# EAGLE board tricolor_rev2 (EAGLE 5.04)
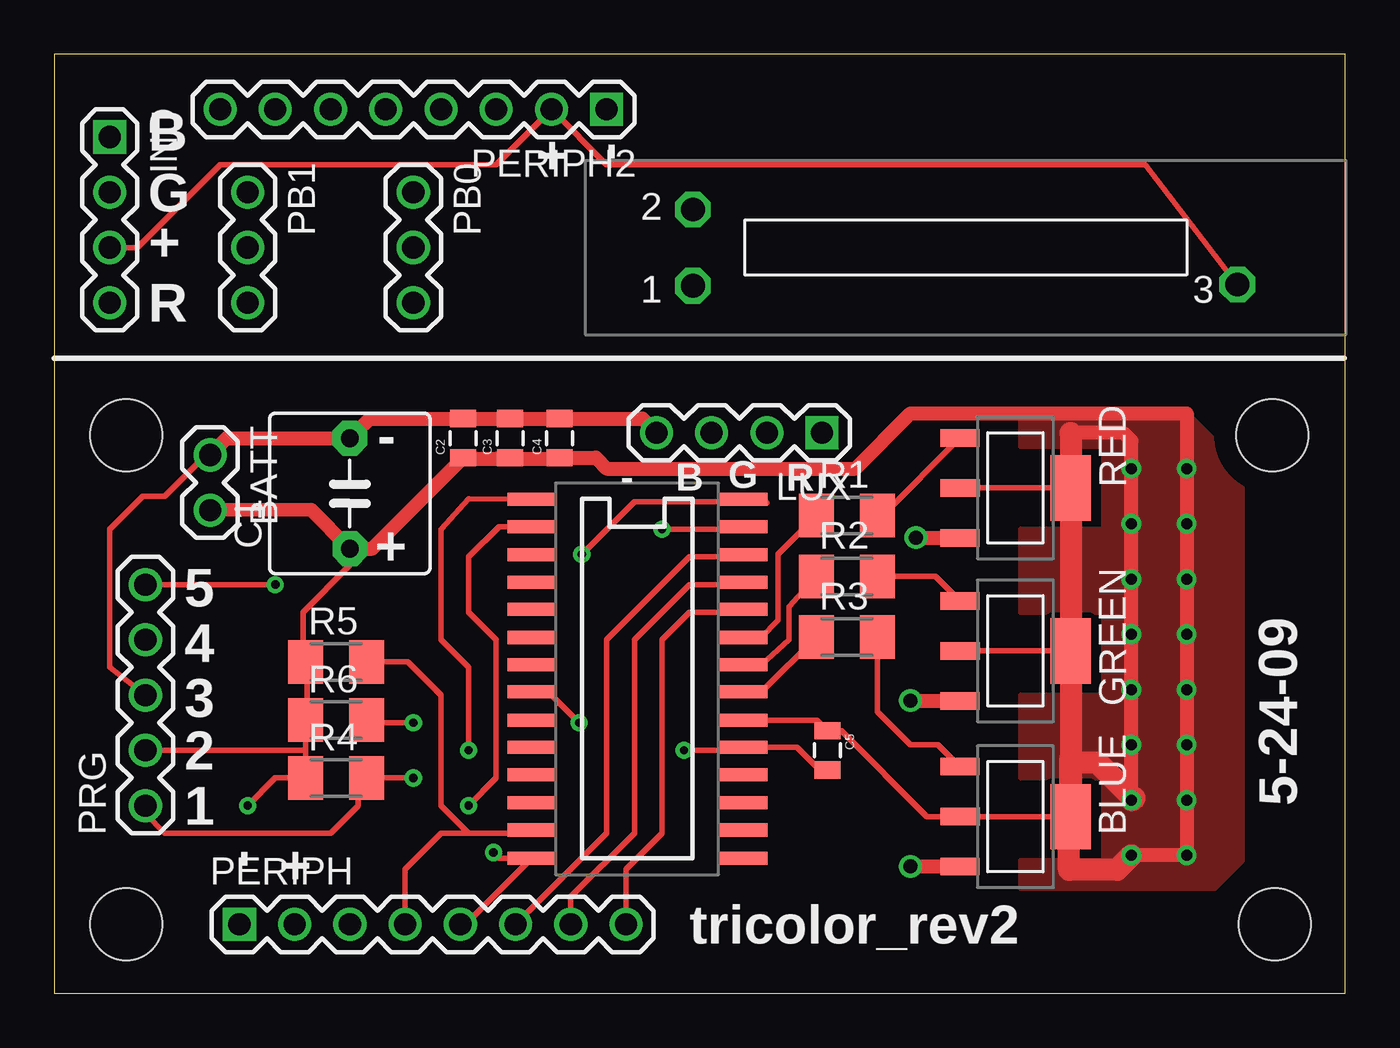
[diagram p0: board, top side]
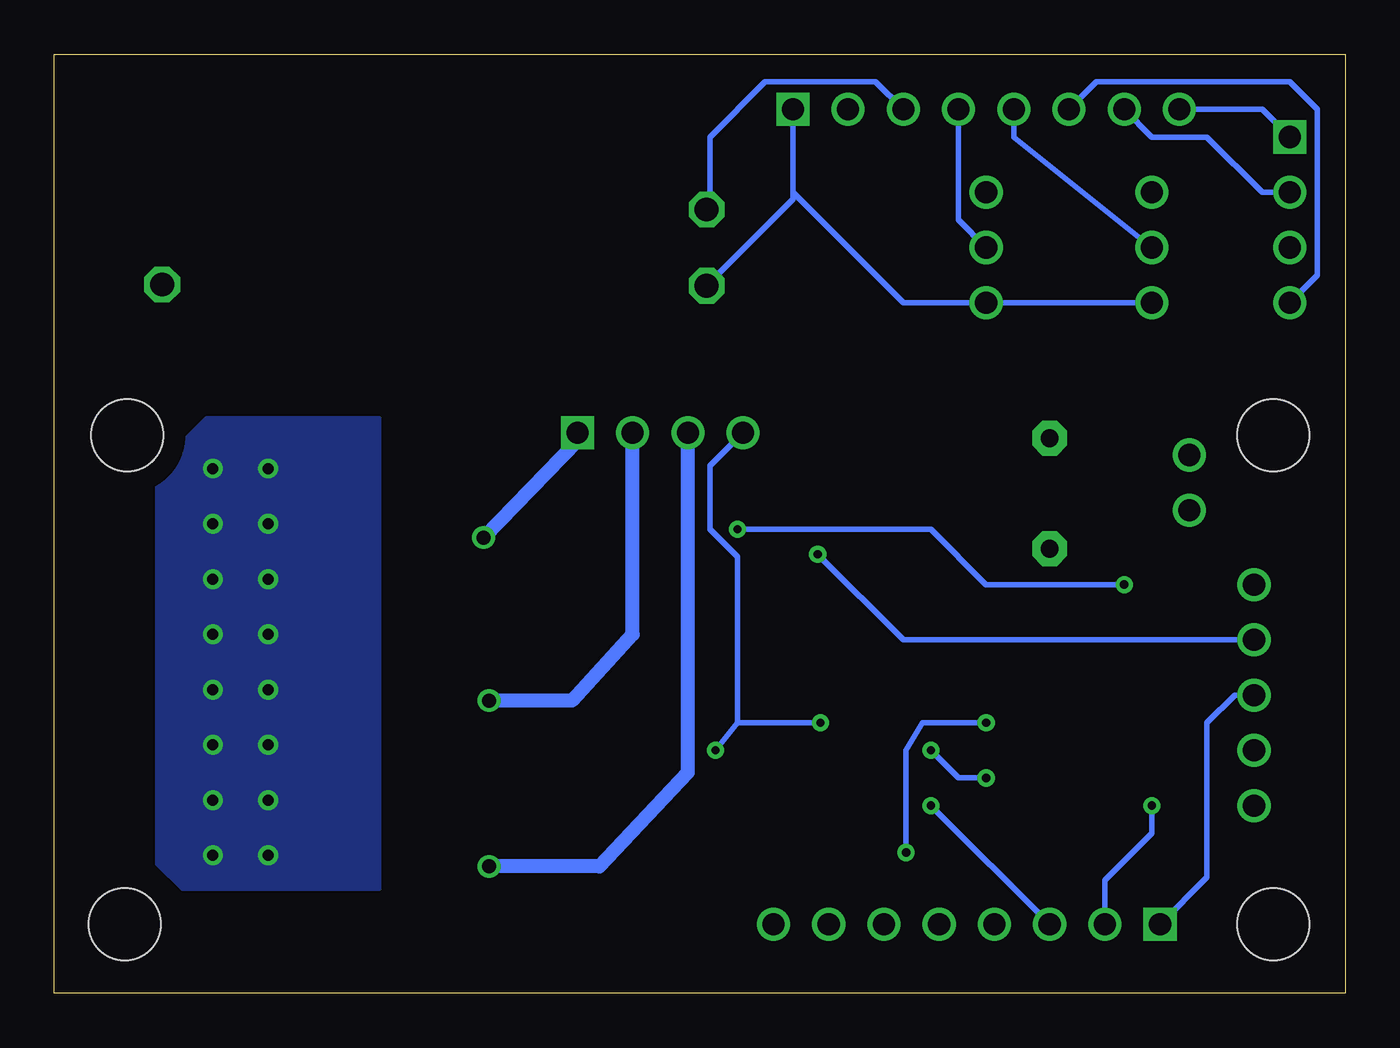
[diagram p1: board, bottom side, seen from below]

Size 59.36 x 43.17 mm. Coordinates in mm from the lower left corner, seen from the top.
Outline: 0,0 59.36,0 59.36,43.17 0,43.17 0,0
Copper layers (1*16): Top 0.035mm / dielectric 1.5mm / Bottom 0.035mm
Design rules "default": minimum track width 10mil, minimum drill 24mil, track to track 8mil, track to pad 8mil, pad to pad 8mil, via to via 8mil, smd to smd 8mil, copper to edge 40mil, drill to drill 8mil, minimum pad ring 10mil, minimum via ring 8mil, stop-mask expansion 4mil, vias tented up to drill 0mil, thermal gap 10mil

## Footprints (pad centres in the part's own frame; a part is rotated, then mirrored left to right if it is on the bottom)
SLIDER-CUSTOM = drill 1.1 octagon: P$1 -12.5,1.7; P$2 12.55,1.75; P$3 12.55,-1.75
1X02 = drill 1.016 round: 1 0,0; 2 2.54,0
SOT223 = smd 0.8 x 1.8: BASE -2.3,-2.55; COLL 0,-2.54; EMIT 2.3,-2.55 | smd 3 x 1.85: HEAT 0,2.54
C5B7.2 = drill 0.813 pad 1.6 octagon: 1 -2.54,0; 2 2.54,0
0805 = smd 0.8 x 1.2: 1 -0.9,0; 2 0.9,0
1X04 = drill 1.016 square: 1 0,0 | drill 1.016 round: 2 2.54,0; 3 5.08,0; 4 7.62,0
SOIC-28 = smd 0.6 x 2.2: 1 -7.6,-4.85; 2 -6.35,-4.85; 3 -5.05,-4.85; 4 -3.8,-4.85; 5 -2.55,-4.85; 6 -1.25,-4.85; 7 0,-4.85; 8 1.25,-4.85; 9 2.55,-4.85; 10 3.8,-4.85; 11 5.05,-4.85; 12 6.35,-4.85; 13 7.6,-4.85; 14 8.9,-4.85; 15 8.9,4.9; 16 7.6,4.9; 17 6.35,4.9; 18 5.05,4.9; 19 3.8,4.9; 20 2.55,4.9; 21 1.25,4.9; 22 0,4.9; 23 -1.25,4.9; 24 -2.55,4.9; 25 -3.8,4.9; 26 -5.05,4.9; 27 -6.35,4.9; 28 -7.6,4.9
1X03 = drill 1.016 round: 1 0,0; 2 2.54,0; 3 5.08,0
1X08 = drill 1.016 square: 1 0,0 | drill 1.016 round: 2 2.54,0; 3 5.08,0; 4 7.62,0; 5 10.16,0; 6 12.7,0; 7 15.24,0; 8 17.78,0
1X05 = drill 1.016 round: 1 0,0; 2 2.54,0; 3 5.08,0; 4 7.62,0; 5 10.16,0
M1206 = smd 1.6 x 2: 1 -1.4,0; 2 1.4,0
STAND-OFF = hole 3.302: 0,0

## Placement (x,y rotation side)
ADJUST  SLIDERV1  [SLIDER-CUSTOM]  41.91,34.29 180 top
BATT  [1X02]  7.16,24.75 270 top
BLUE  FZTA14V1  [SOT223]  44.2,8.13 270 top
C1  100uf  [C5B7.2]  13.59,22.99 90 top
C2  .01uF  [0805]  18.8,25.53 90 top
C3  .1uF  [0805]  20.95,25.53 90 top
C4  .1uF  [0805]  23.24,25.53 90 top
C5  .01uF  [0805]  35.56,11.18 270 top
GREEN  FZTA14V1  [SOT223]  44.2,15.75 270 top
IND  [1X04]  2.54,39.37 270 top
LUX  [1X04]  35.31,25.78 180 top
MCU  P18F2221V1  [SOIC-28]  26.8,15.11 270 top
PB0  [1X03]  16.51,36.83 270 top
PB1  [1X03]  8.89,36.83 270 top
PERIPH  [1X08]  8.51,3.17 0 top
PERIPH2  [1X08]  25.4,40.64 180 top
PRG  [1X05]  4.19,8.64 90 top
R1  6.65K  [M1206]  36.45,21.97 0 top
R2  3.3K  [M1206]  36.45,19.18 0 top
R3  3.3K  [M1206]  36.45,16.38 0 top
R4  10K  [M1206]  12.95,9.91 0 top
R5  10K  [M1206]  12.95,15.24 0 top
R6  10K  [M1206]  12.95,12.57 0 top
RED  FZTA14V1  [SOT223]  44.2,23.24 270 top
U$1  [STAND-OFF]  3.3,3.17 0 top
U$2  [STAND-OFF]  3.3,25.65 0 top
U$3  [STAND-OFF]  56.01,25.65 0 top
U$4  [STAND-OFF]  56.13,3.17 0 top

## Library data of the parts
ADJUST BLUE GREEN MCU RED = purduecer
BATT C2-C5 IND LUX PB0 PB1 PERIPH PERIPH2 PRG U$1-U$4 = SparkFun
C1 = capacitor-wima
R1-R6 = resistor

## Nets
BLUE: IND.1 PERIPH2.8
BLUE_IND: MCU.24 PERIPH.8
BLUE_LUX: BLUE.EMIT LUX.3
GND: BATT.1 C1.2 C2.2 C3.2 C4.2 C5.2 LUX.4 MCU.8 MCU.19 PERIPH.1 PRG.3
GREEN: IND.2 PERIPH2.7
GREEN_IND: MCU.25 PERIPH.7
GREEN_LUX: GREEN.EMIT LUX.2
MCLR: MCU.1 PRG.1 R4.2
N$4: MCU.23 R1.1
N$5: R1.2 RED.BASE
N$6: MCU.22 R2.1
N$7: GREEN.BASE R2.2
N$8: MCU.21 R3.1
N$9: BLUE.BASE R3.2
PB0: MCU.13 PERIPH.4 R5.2
PB1: MCU.14 PERIPH.5 R6.2
PB_0: PB0.2 PERIPH2.4
PB_1: PB1.2 PERIPH2.5
PGC: MCU.27 PRG.5
PGD: MCU.28 PRG.4
POT: MCU.2 PERIPH.3
PWR: ADJUST.P$1 IND.3 PERIPH2.2
RED: IND.4 PERIPH2.6
RED_IND: MCU.26 PERIPH.6
RED_LUX: LUX.1 RED.EMIT
SLIDE: ADJUST.P$3 PERIPH2.3
VCC: BATT.2 BLUE.COLL BLUE.HEAT C1.1 C2.1 C3.1 C4.1 C5.1 GREEN.COLL GREEN.HEAT MCU.20 PERIPH.2 PRG.2 R4.1 R5.1 R6.1 RED.COLL RED.HEAT
VSS: ADJUST.P$2 PB0.3 PB1.3 PERIPH2.1

## Tracks (layer width: path | path; a pad name or v marks a point on that pad's centre or on a via)
BLUE
  Bottom 0.254: IND.1 3.81,40.64 PERIPH2.8
BLUE_IND
  Top 0.254: PERIPH.8 26.29,5.71 27.94,7.37 27.94,16.26 29.21,17.53 31.56,17.53 MCU.24
BLUE_LUX  (via drill 0.64)
  Top 0.254: 41.51,5.84 BLUE.EMIT
  Top 0.635: v39.37,5.84 41.51,5.84
  Bottom 0.635: LUX.3 30.23,10.16 34.29,5.84 v39.37,5.84
GND  (via drill 0.38)
  Top 0.254: C2.2 19.36,26.42 | 20.37,26.42 C3.2 21.39,26.42 | 22.81,26.42 C4.2 | 22.71,13.86 MCU.8 | v24.13,12.45 22.71,13.86 | v28.96,11.18 31.56,11.18 MCU.19 34.15,11.31 35.05,10.41 35.42,10.41 C5.2 | 22.71,13.86 23.01,13.86 | PRG.3 2.54,14.99 2.54,21.34 4.06,22.86 5.08,22.86 6.97,24.75 BATT.1
  Top 0.635: 19.36,26.42 20.37,26.42 | 21.39,26.42 22.81,26.42 | C2.2 14.49,26.43 C1.2 7.93,25.53 BATT.1 | C4.2 27.04,26.43 LUX.4
  Bottom 0.254: PRG.3 5.08,13.72 6.35,12.45 6.35,5.33 PERIPH.1 | 27.94,12.45 v24.13,12.45 | 27.94,12.45 v28.96,11.18 | LUX.4 29.21,24.26 29.21,21.34 27.94,20.07 27.94,12.45
GREEN
  Bottom 0.254: IND.2 3.81,36.83 6.35,39.37 8.89,39.37 PERIPH2.7
GREEN_IND
  Top 0.254: PERIPH.7 23.75,4.45 26.67,7.37 26.67,16.26 29.21,18.8 31.58,18.8 MCU.25
GREEN_LUX  (via drill 0.64)
  Top 0.254: 41.51,13.46 GREEN.EMIT
  Top 0.635: v39.37,13.46 41.51,13.46
  Bottom 0.635: LUX.2 32.77,16.51 35.56,13.46 v39.37,13.46
MCLR  (via drill 0.38)
  Top 0.254: 14.86,9.91 R4.2 | 14.86,9.91 v16.51,9.91 | 21.84,22.61 MCU.1 19.05,22.73 17.78,21.34 17.78,16.26 19.05,14.99 v19.05,11.18 | PRG.1 4.19,8.26 5.08,7.37 12.7,7.37 13.97,8.64 13.97,9.02 14.86,9.91
  Bottom 0.254: v16.51,9.91 17.78,9.91 v19.05,11.18
N$4
  Top 0.254: MCU.23 32.49,16.36 33.27,17.14 33.27,20.2 R1.1
N$5
  Top 0.254: R1.2 38.08,21.97 RED.BASE
N$6
  Top 0.254: MCU.22 32.51,15.11 33.78,16.26 33.78,17.78 R2.1
N$7
  Top 0.254: R2.2 40.52,19.18 GREEN.BASE
N$8
  Top 0.254: MCU.21 32.53,13.86 R3.1
N$9
  Top 0.254: R3.2 37.85,12.95 39.37,11.43 40.64,11.43 BLUE.BASE
PB0
  Top 0.254: 19.05,7.37 17.78,7.37 16.13,5.71 PERIPH.4 | 19.05,7.37 21.8,7.37 MCU.13 | R5.2 16.26,15.24 17.78,13.72 17.78,8.64 19.05,7.37
PB1  (via drill 0.38)
  Top 0.254: PERIPH.5 18.91,3.17 MCU.14 20.44,6.21 v20.19,6.48 | v16.51,12.45 14.48,12.45 R6.2
  Bottom 0.254: v20.19,6.48 20.19,11.18 19.43,12.45 v16.51,12.45
PB_0
  Bottom 0.254: PB0.2 17.78,35.56 PERIPH2.4
PB_1
  Bottom 0.254: PB1.2 15.24,39.37 PERIPH2.5
PGC  (via drill 0.38)
  Top 0.254: PRG.5 v10.16,18.8 | v27.94,21.34 31.57,21.34 MCU.27
  Bottom 0.254: v10.16,18.8 16.51,18.8 19.05,21.34 v27.94,21.34
PGD  (via drill 0.38)
  Top 0.254: 32.77,22.55 MCU.28 31.59,22.61 26.67,22.61 v24.26,20.19
  Bottom 0.254: PRG.4 20.32,16.26 v24.26,20.19
POT  (via drill 0.38)
  Top 0.254: v19.05,8.64 20.32,9.91 20.32,16.26 19.05,17.53 19.05,20.07 20.45,21.46 MCU.2 21.82,21.34
  Bottom 0.254: PERIPH.3 v19.05,8.64
PWR
  Top 0.254: IND.3 3.81,34.29 7.62,38.1 20.32,38.1 PERIPH2.2 25.4,38.1 50.17,38.1 ADJUST.P$1
RED
  Bottom 0.254: PERIPH2.6 11.43,41.91 2.54,41.91 1.27,40.64 1.27,33.02 IND.4
RED_IND
  Top 0.254: PERIPH.6 25.4,7.37 25.4,16.26 29.21,20.07 31.6,20.07 MCU.26
RED_LUX  (via drill 0.64)
  Top 0.254: 41.51,20.95 RED.EMIT
  Top 0.635: v39.62,20.95 41.51,20.95
  Bottom 0.635: LUX.1 35.31,25.4 v39.62,20.95
SLIDE
  Bottom 0.254: PERIPH2.3 21.59,41.91 26.67,41.91 29.21,39.37 29.21,36.19 ADJUST.P$3
VCC  (via drill 0.38, 0.51)
  Top 0.254: C2.1 19.36,24.59 | 20.37,24.59 C3.1 21.39,24.59 | 22.81,24.59 C4.1 | 11.55,11.18 R4.1 10.16,9.91 v8.89,8.64 | 11.55,11.18 R6.1 11.63,13.41 11.63,14.43 R5.1 11.43,15.36 11.43,17.53 13.59,19.68 C1.1 | 11.55,11.18 PRG.2 | MCU.20 35.07,12.56 C5.1 35.57,12.06 36.2,12.06 40.13,8.13 46.1,8.13 | RED.HEAT RED.COLL | 43.69,15.75 GREEN.HEAT 46.74,15.24 | 46.1,8.13 BLUE.HEAT 46.74,15.24 | 46.1,8.13 BLUE.COLL | 43.69,15.75 GREEN.COLL | 43.69,15.75 46.23,15.75 46.74,15.24 | 46.74,8 46.23,8 46.1,8.13
  Top 0.635: 19.36,24.59 20.37,24.59 | 21.39,24.59 22.81,24.59 | BATT.2 11.81,22.23 C1.1 14.62,20.45 C2.1 | C4.1 24.9,24.63 25.4,24.13 36.83,24.13 39.37,26.67 52.07,26.67 v52.07,24.13 v52.07,21.59 v52.07,19.05 v52.07,16.51 v52.07,13.97 v52.07,11.43 v52.07,8.89 v52.07,6.35 v49.53,6.35 | v49.53,8.89 v49.53,11.43 v49.53,13.97 v49.53,16.51 v49.53,19.05 v49.53,21.59 v49.53,24.13 49.53,25.4 49.16,25.77 46.73,25.77 46.74,25.77
  Top 1.016: GREEN.HEAT RED.HEAT 46.74,25.77 | 46.74,15.24 46.74,8 | v49.53,6.35 48.87,5.68 46.66,5.68 46.66,8.9 46.73,8.97 46.73,10.82 46.94,10.62 47.97,10.62 49.61,8.97 49.67,8.97 49.59,8.89 v49.53,8.89
  Bottom 0.254: PERIPH.2 11.05,5.21 8.89,7.37 v8.89,8.64
  pour Top: 44.45,4.83 44.45,6.1 48.26,6.1 48.26,9.91 44.45,9.91 44.45,13.72 48.26,13.72 48.26,17.53 44.45,17.53 44.45,21.34 48.26,21.34 48.26,25.15 44.45,25.15 44.45,26.42 52.34,26.42 54.61,24.11 54.61,6.1 53.34,4.83
  pour Bottom: 44.45,26.42 52.07,26.42 52.32,26.42 54.61,24.13 54.61,6.35 54.61,5.97 53.47,4.83 44.45,4.83
VSS
  Bottom 0.254: PB1.3 PB0.3 20.32,31.75 25.4,36.83 | ADJUST.P$2 25.4,36.5 25.4,36.83 | 25.4,36.83 PERIPH2.1

## Text on the board
tPlace: B | + | - | G | + | R | - | - | B | G | R | + | 5 | 4 | 3 | 2 | 5-24-09 | 1 | - | + | tricolor_rev2